# Altium PCB pcb_mcp2200.PcbDoc
Units mm, origin at the board's own origin, x right, y up, seen from the top; angles counter-clockwise.
Board outline 52.5 x 25 mm, 2 copper layers (Top Layer, Bottom Layer); 18 components, 24 nets, 83 pads, 15 vias.
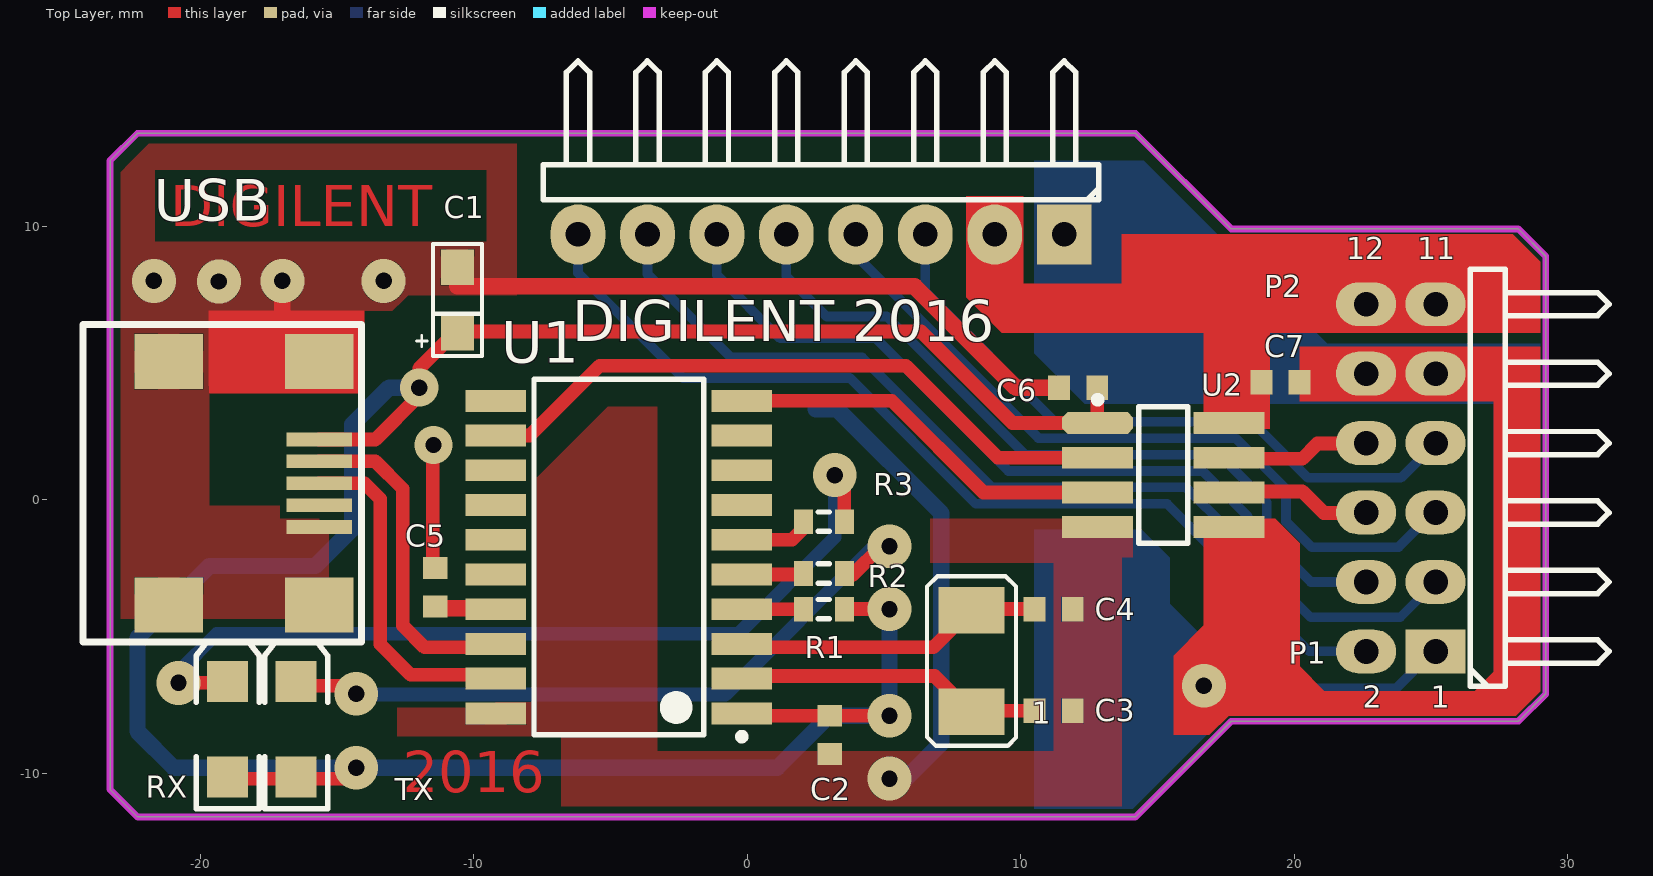
[diagram p0: Top Layer view]
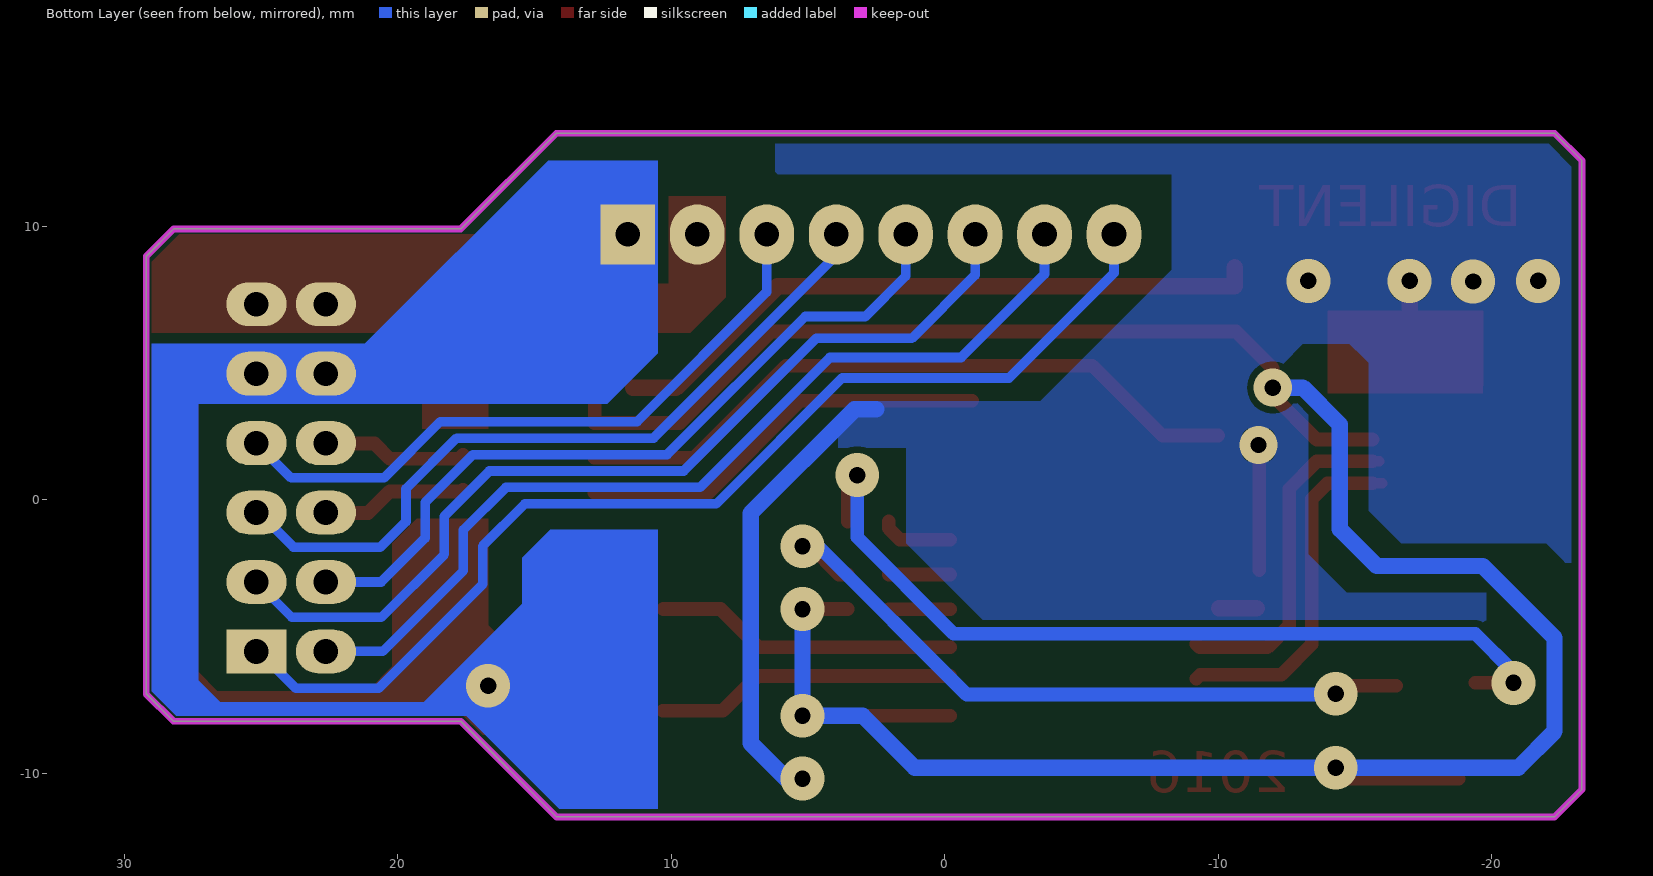
[diagram p1: Bottom Layer view, seen from below]
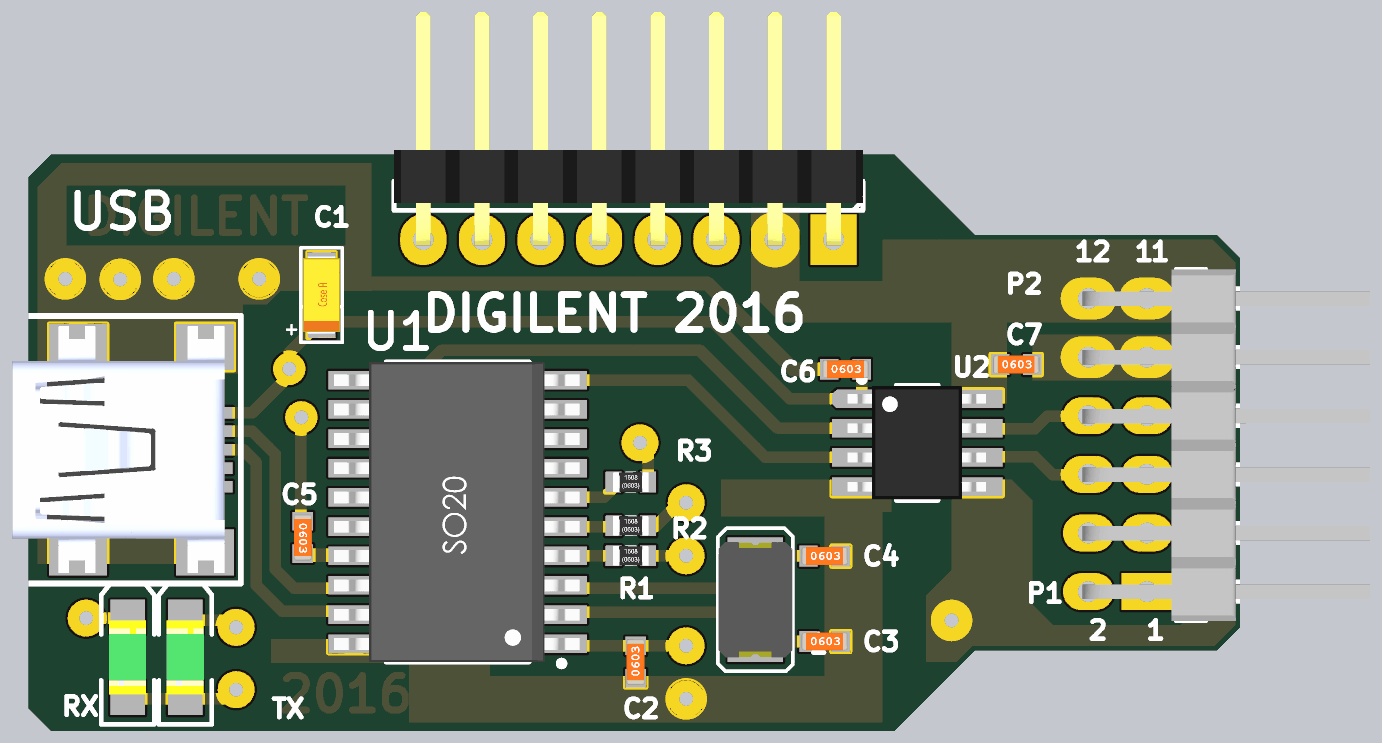
[diagram p2: 3D render of the assembled board from above, using the file's embedded part models]

## Layer stack, top to bottom
Top Solder: solder mask 0.0102, Solder Resist, Dk 3.5
Top Layer: signal copper 0.0356
Dielectric 1: dielectric 0.32, FR-4, Dk 4.8
Bottom Layer: signal copper 0.0356
Bottom Solder: solder mask 0.0102, Solder Resist, Dk 3.5

## Board outline
-23.3,-10.6 -23.3,12.4 -22.3,13.4 14.2,13.4 17.7,9.9 28.2,9.9 29.2,8.9 29.2,-7.1 28.2,-8.1 17.7,-8.1 14.2,-11.6 -22.3,-11.6

## Design rules (kind name [scope] priority, off if disabled: settings)
Clearance [All] p1: gap=0.25
DiffPairsRouting [All] p1: maxlimit=0.254 minlimit=0.25 mostfreqgap=0.25 toplayer_maxgap=0.25 toplayer_minwidth=0.1 toplayer_maxwidth=1 toplayer_prefwidth=0.5 bottomlayer_minwidth=0.1 bottomlayer_maxwidth=1 bottomlayer_prefwidth=0.5 maxuncoupledlength=12.7
PolygonConnect [All] p1: connectstyle=Relief reliefconductorwidth=0.8 reliefentries=4 polygonreliefangle="90 Angle" airgapwidth=0.01
RoutingVias [All] p1: holewidth=0.711 width=1.27 viastyle="Through Hole" minholewidth=0.711 minwidth=1.27 maxholewidth=0.711 maxwidth=1.27
SolderMaskExpansion [All] p1: expansion=0.102
UnpouredPolygon [All] p1: allowunpoured=FALSE
Width [All] p1: maxlimit=1 minlimit=0.1 preferedwidth=0.3
28 further rules are at their usual default settings.

## Classes and differential pairs
differential pair USB: +USB_P -USB_N

## Components (designator, comment, footprint, x,y, rotation, side; value= is the part's Value field where it differs from the comment)
1 "XTAL" Cuart_SMD_5032 8.2,-5.9 r270 top
C1 "Cap Pol1" "case A" -10.6,7.3 r90 top
C2 "Cap" 0603(C) 3,-8.6 r90 top
C3 "Cap" 0603(C) 11.2,-7.7 r0 top
C4 "Cap" 0603(C) 11.2,-4 r0 top
C5 "Cap" 0603(C) -11.4,-3.2 r270 top
C6 "Cap" 0603(C) 12.1,4.1 r0 top
C7 "Cap" 0603(C) 19.5,4.3 r0 top
P1 "Header 6X2H" "Header 2x6_right angle" 23.9,0.8 r0 top
P2 "Header 8H" "Header_1x8_right angle" 2.7,9.7 r0 top
R1 "Res2" "RezistorSMD (1608)" 2.8,-4 r0 top
R2 "Res2" "RezistorSMD (1608)" 2.8,-2.7 r0 top
R3 "Res2" "RezistorSMD (1608)" 2.8,-0.8 r0 top
RX "LED3" "led smd verde" -19,-8.4 r90 top (schematic designator LED2)
TX "LED3" "led smd verde" -16.5,-8.4 r90 top (schematic designator LED1)
U1 "MCP2200" SOIC_20 -4.7,-2.1 r180 top
U2 "ADUM1201CRZ" "SOIC 8 pini" 15.2,0.9 r0 top
USB "USB MINI B" "USB MINI B" -18.4,0.6 r0 top

## Footprints (in the part's own frame and the unit in brackets; to place one, negate y for a bottom-side part, rotate by r counter-clockwise, add the part's x,y. Pads: shape width x height; smd on the part's side, far side on the other; paste and mask are expansions set on the pad)
0603(C) [mm] "Condensator SMD (1,6 X 0,8) mm"
  rect 0.8x0.9 smd: 1(-0.7,-0.013) 2(0.7,-0.013)
  body extent -1,-0.4 1,0.38, height 0.77
"case A" [mm] "condensator smd tantal case A [3216]"
  rect 1.3x1.2 smd: 1(-1.2,0) 2(1.2,0)
  silkscreen extent -2.05,-0.9 2.05,1.5, body extent -1.7,-0.8 1.7,0.8, height 1.65
Cuart_SMD_5032 [mm]
  rect 1.7x2.4 smd: 1(-1.85,0) 2(1.85,0)
  silkscreen extent -3.1,-1.63 3.1,1.63, body extent -2.5,-1.6 2.5,1.6, height 1.35
"Header 2x6_right angle" [mm]
  rect 2.2x1.6 hole 0.9: 1(1.27,-6.35)
  oval 2.2x1.6 hole 0.9: 2(-1.27,-6.35) 3(1.27,-3.81) 4(-1.27,-3.81) 5(1.27,-1.27) 6(-1.27,-1.27) 7(1.27,1.27) 8(-1.27,1.27) 9(1.27,3.81) 10(-1.27,3.81) 11(1.27,6.35) 12(-1.27,6.35)
  silkscreen extent 2.54,-7.62 7.62,7.62, body extent -1.52,-7.63 10.93,7.61, height 5.6
"Header_1x8_right angle" [mm]
  rect 2x2.2 hole 0.9: 1(8.89,0)
  oval 2x2.2 hole 0.9: 2(6.35,0) 3(3.81,0) 4(1.27,0) 5(-1.27,0) 6(-3.81,0) 7(-6.35,0) 8(-8.89,0)
  silkscreen extent -10.16,1.27 10.16,6.35, body extent -10.16,-0.25 10.16,9.88, height 2.51
"led smd verde" [mm]
  rect 1.5x1.5 smd: 1(-1.75,0) 2(1.75,0)
  silkscreen extent -2.9,-1.15 3.2,1.15, body extent -1.6,-0.79 1.6,0.81, height 1.11
"RezistorSMD (1608)" [mm]
  rect 0.7x0.9 smd: 1(0.75,0) 2(-0.75,0)
  silkscreen extent -0.2,-0.35 0.2,0.35, body extent -0.77,-0.43 0.78,0.42, height 0.45
"SOIC 8 pini" [mm]
  oct 2.6x0.8 smd: 1(-2.387,1.905)
  rect 2.6x0.8 smd: 2(-2.387,0.635) 3(-2.387,-0.635) 4(-2.387,-1.905) 5(2.413,-1.905) 6(2.413,-0.635) 7(2.413,0.635) 8(2.413,1.905)
  silkscreen extent -2.51,-2.5 0.91,2.88, body extent -3,-2.45 3,2.45, height 1.75
SOIC_20 [mm]
  rect 2.2x0.8 smd: 1(-4.5,5.715) 2(-4.5,4.445) 3(-4.5,3.175) 4(-4.5,1.905) 5(-4.5,0.635) 6(-4.5,-0.635) 7(-4.5,-1.905) 8(-4.5,-3.175) 9(-4.5,-4.445) 10(-4.5,-5.715) 11(4.5,-5.715) 12(4.5,-4.445) 13(4.5,-3.175) 14(4.5,-1.905) 15(4.5,-0.635) 16(4.5,0.635) 17(4.5,1.905) 18(4.5,3.175) 19(4.5,4.445) 20(4.5,5.715)
  silkscreen extent -4.62,-6.5 3.1,6.69, body extent -5.28,-6.49 5.35,6.51, height 2.66
"USB MINI B" [mm]
  rect 2.4x0.5 smd: 1(2.75,1.6) 2(2.75,0.8) 3(2.75,0) 4(2.75,-0.8) 5(2.75,-1.6)
  rect 2.5x2 smd: PAD(-2.75,-4.45) PAD(-2.75,4.45) PAD(2.75,-4.45) PAD(2.75,4.45)
  silkscreen extent -5.9,-5.8 4.3,5.8, body extent -5.6,-5.35 3.6,5.35, height 3.95

## Part data
1: "Crystal Oscillator"
C1: "Polarized Capacitor (Radial)"
C2 C3 C4 C5 C6 C7: "Capacitor"
P1: "Header, 6-Pin, Dual row, Right Angle"
P2: "Header, 8-Pin, Right Angle"
R1 R2 R3: "Resistor"
RX TX: "Typical BLUE SiC LED"
U1: "USB 2.0 to UART Protocol Converter with GPIO"

## Via types
v1: diameter 1.6, hole 0.6, Top Layer to Bottom Layer, 13 vias
v2: diameter 1.4, hole 0.6, Top Layer to Bottom Layer, 2 vias

## Nets (pads, with @x,y where several pads share a name; then routed paths per layer and width w, separated by ;. In a path a pad name is that pad's centre, name@x,y a point inside that pad or via, vN(x,y) a via of type N, cw(c..) or ccw(c..) an arc to the next point about the centre after c; other vN are vias at no path point)
+5V: C1.1 C2.2 C6.2 R1.1 RX.1 TX.1 U1.1 U2.1 USB.1 | length 97.5
  Top Layer w0.5: RX.1@-18.8,-10.2 -14.7,-10.2 v1(-14.3,-9.8) ; USB.1 -13.6,2.2 -12,3.8 v2(-12,4.1) -12,4.8 -10.65,6.15 6.35,6.15 9.695,2.805 U2.1 ; U1.1@-0.2,-7.9 v1(5.2,-7.9) ; R1.1 v1(5.2,-4) ; U2.1@12.8,2.818 C6.2
  Bottom Layer w0.6: v2(-12,4.1) -13.1,4.1 -14.45,2.75 -14.45,-1.075 -15.8,-2.425 -19.675,-2.425 -22.3,-5.05 -22.3,-8.475 -20.975,-9.8 v1(-14.3,-9.8) 1.1,-9.8 3,-7.9 v1(5.2,-7.9) v1(5.2,-4)
GND: C1.2 C2.1 C3.2 C4.2 C5.1 C6.1 U1.20 U2.4 USB.5 USB.PAD | length 49.3
  Top Layer w0.5: C5.1@-11.5,-2.575 v2@-11.5,2
  Top Layer w0.6: v1(-17,8) -17,6.4 USB.PAD@-15.65,5.05 ; C1.2 -10.6,7.8 6.118,7.8 9.831,4.087 C6.1
  Bottom Layer w0.6: 2.5,3.3 3.3,3.3 7.1,-0.5 7.1,-8.9 5.8,-10.2 v1(5.2,-10.2)
  other v1: -19.322,7.978 -21.7,8 -13.3,8
  other v2: -11.475,2
GND_TARGET: C7.2 P1.9 P1.10 P2.1 U2.5
  other v1: 16.7,-6.8
I/O_1: P1.1 P2.8 | length 40.4
  Bottom Layer w0.35: P2.8 -6.19,8.29 -2.35,4.45 3.75,4.45 8.35,-0.15 15.35,-0.15 16.9,-1.7 16.9,-3.1 20.7,-6.9 23.73,-6.9 25.08,-5.55 P1.1
I/O_2: P1.2 P2.7 | length 34.3
  Bottom Layer w0.35: P2.7 -3.65,8.25 -0.6,5.2 4.2,5.2 8.95,0.45 16.05,0.45 17.6,-1.1 17.6,-2.6 20.55,-5.55 P1.2
I/O_3: P1.3 P2.6 | length 34.3
  Bottom Layer w0.35: P2.6 -1.11,8.21 1.2,5.9 4.7,5.9 9.55,1.05 16.65,1.05 18.3,-0.6 18.3,-2 20.6,-4.3 23.88,-4.3 P1.3
I/O_4: P1.4 P2.5 | length 28.1
  Bottom Layer w0.35: P2.5 1.43,8.17 2.9,6.7 5.1,6.7 10.15,1.65 17.25,1.65 19,-0.1 19,-1.4 20.61,-3.01 P1.4
I/O_5: P1.5 P2.4 | length 27.6
  Bottom Layer w0.35: P2.4 3.97,8.93 10.65,2.25 17.85,2.25 19.7,0.4 19.7,-0.8 20.635,-1.735 23.815,-1.735 25.08,-0.47 P1.5
I/O_6: P1.7 P2.3 | length 24.1
  Bottom Layer w0.35: P2.3 6.51,7.59 11.25,2.85 18.45,2.85 20.5,0.8 23.9,0.8 P1.7
Net1_1: 1.1 C4.1 U1.3 | length 11.1
  Top Layer w0.5: U1.3@-0.2,-5.4 6.8,-5.4 8.2,-4 C4.1@10.287,-4
Net1_2: 1.2 C3.1 U1.2 | length 11
  Top Layer w0.5: U1.2@-0.2,-6.45 6.85,-6.45 8.113,-7.713 C3.1@10.3,-7.713
NetC5_2: C5.2 U1.17 | length 1.4
  Top Layer w0.6: C5.2@-11.413,-3.975 U1.17@-10.03,-3.975
NetR1_2: R1.2 U1.4 | length 2.3
  Top Layer w0.5: U1.4 R1.2@2.05,-4.005
NetR2_1: R2.1 TX.2 | length 26.2
  Top Layer w0.5: TX.2@-16.5,-6.8 -14.6,-6.8 v1(-14.3,-7.1) ; R2.1@3.55,-2.735 3.865,-2.735 4.9,-1.7 v1(5.2,-1.7)
  Bottom Layer w0.5: v1(-14.3,-7.1) -14.275,-7.125 -0.8,-7.125 4.625,-1.7 v1(5.2,-1.7)
NetR2_2: R2.2 U1.5 | length 2.3
  Top Layer w0.5: U1.5 R2.2@2.05,-2.735
NetR3_1: R3.1 RX.2 | length 32
  Top Layer w0.5: v1(-20.8,-6.7) RX.2@-19.4,-6.7 ; v1(3.2,0.9) 3.55,0.55 R3.1
  Bottom Layer w0.5: v1(-20.8,-6.7) -20.8,-6.3 -19.4,-4.9 -0.325,-4.9 3.2,-1.375 v1(3.2,0.9)
NetR3_2: R3.2 U1.6 | length 2.7
  Top Layer w0.5: U1.6 1.635,-1.465 2.05,-1.05 R3.2
RX: U1.12 U2.2 | length 25.3
  Top Layer w0.5: U1.12@-10,2.345 -7.955,2.345 -5.4,4.9 5.8,4.9 9.165,1.535 U2.2
RX_TARGET: P1.6 U2.6 | length 5.3
  Top Layer w0.5: U2.6@17.613,0.365 17.678,0.3 20.3,0.3 21.085,-0.485 P1.6@22.525,-0.485
TX: U1.10 U2.3 | length 15.2
  Top Layer w0.5: U1.10@-1,3.615 5.285,3.615 8.635,0.265 U2.3
TX_TARGET: P1.8 U2.7 | length 5.2
  Top Layer w0.5: U2.7@17.613,1.635 17.748,1.5 20.3,1.5 20.855,2.055 P1.8@22.525,2.055
USB_N: U1.18 USB.2 | length 12.5
  Top Layer w0.381: USB.2@-15.9,1.4 USB.2
  Top Layer w0.5: USB.2 -13.6,1.4 -12.6,0.4 -12.6,-4.6 -11.8,-5.4 -9.325,-5.4 U1.18
USB_P: U1.19 USB.3 | length 12.9
  Top Layer w0.381: USB.3@-16,0.6 USB.3
  Top Layer w0.5: USB.3 -14,0.6 -13.425,0.025 -13.425,-5.286 -12.311,-6.4 -9.345,-6.4 U1.19
VDD_TARGET: C7.1 P1.11 P1.12 P2.2 U2.8
pads on no net: U1.7 U1.8 U1.9 U1.11 U1.13 U1.14 U1.15 U1.16 USB.4

## Polygon pours and split planes (outlines as drawn)
GND on Top Layer "GND" (solid, pour order 4): -23.05,-4.35 -15.3,-4.35 -15.3,-3.35 -15.3,-0.85 -15.8,-0.35 -15.925,-0.225 -16.975,-0.225 -19.675,-0.225 -19.675,0.95 -19.675,3.9 -16.675,6.9 -15.575,6.9 -12.975,6.9 -12.6,7.275 -12.4,7.475 -10.675,7.475 -8.425,7.475 -8.425,10.275 -8.425,13.4 -21.5,13.4 -22.6,12.3 -23.1,11.8 -23.1,10.65 -23.1,-4.35
GND on Top Layer "GND" (solid, pour order 2): 12.813,-1.005 12.813,-0.7 10.2,-0.7 6.7,-0.7 6.7,-1.6 6.7,-2.3 9.9,-2.3 11.2,-2.3 11.2,-3.4 11.2,-9.2 1.213,-9.2 -3.3,-9.2 -3.3,3.4 -4.8,3.4 -5.1,3.4 -6.4,2.1 -7.7,0.8 -7.7,-0.3 -7.7,-7.6 -9,-7.6 -12.8,-7.6 -12.8,-8.6 -12.8,-9.1 -14.3,-9.1 -12.8,-9.1 -12.8,-11.6 13.7,-11.6 13.7,-2.1 14,-2.1 14.1,-2.1 14.1,-1
GND on Bottom Layer "GND" (solid, pour order 10): -23.3,-1.7 -23.3,11.8 -21.7,13.4 6.2,13.4 6.2,11.9 -7.3,11.9 -8.3,11.9 -8.3,10.4 -8.3,8.4 -6.3,6.4 -3.5,3.6 -1.2,3.6 3.1,3.6 3.9,2.8 3.9,2.2 3.9,1.9 2.7,1.9 1.4,1.9 1.4,0.6 1.4,-1.6 0.3,-2.7 -2.1,-5.1 -4.5,-5.1 -19.8,-5.1 -19.8,-3.7 -19.8,-3.4 -15.6,-3.4 -14.7,-3.4 -13.3,-2 -13.3,0.1 -13.3,3.2 -12.7,3.8 -12.3,4.2 -12.3,4.9 -13.1,5.7 -14.7,5.7 -14.8,5.7 -15.3,5.2 -15.5,5 -15.5,3.8 -15.5,-0.4 -16.5,-1.4 -16.7,-1.6 -18.9,-1.6 -22,-1.6 -22.6,-2.2 -22.7,-2.3 -23.3,-2.3

## Keep-outs
Keep-Out Layer:
  lines w0.25: -23.3,-10.6 -23.3,12.4 -22.3,13.4 3.2,13.4 14.2,13.4 17.7,9.9 28.2,9.9 29.2,8.9 29.2,-7.1 28.2,-8.1 17.7,-8.1 14.2,-11.6 -22.3,-11.6 -23.3,-10.6

## Other copper
Top Layer:
  region net GND: -19.675,3.9 -14,3.9 -14,6.9 -19.7,6.9 -19.7,4.4
  region net GND_TARGET: 27.3,3.6 27.3,-6.3 26.6,-7 21.1,-7 20.2,-6.1 20.2,-7.9 28.1,-7.9 29,-7 29,5.6 27.6,5.6 27.6,3.6
  region net GND_TARGET: 16.7,-0.7 19.3,-0.7 20.2,-1.6 20.2,-7.9 17.6,-7.9 16.9,-8.6 15.6,-8.6 15.6,-5.7 16.7,-4.6
  region net GND_TARGET: 20.2,4.287 20.2,5.6 27.6,5.6 27.6,3.6 20.2,3.6
  region net VDD_TARGET: 16.7,6.1 16.7,2.6 19.1,2.6 19.1,6.1
  region net VDD_TARGET: 8,11.1 8,7.4 9.3,6.1 29,6.1 29,8.7 28,9.7 13.7,9.7 13.7,7.9 10.1,7.9 10.1,11.1
  text "DIGILENT" at -21.1,10 h1.5
  text "2016" at -12.6,-10.7 h1.5
Bottom Layer:
  region net GND_TARGET: 27.7,5.7 29,5.7 29,-7 28.1,-7.9 17.5,-7.9 14.1,-11.3 10.5,-11.3 10.5,-1.1 14.425,-1.1 15.45,-2.125 15.45,-3.8 19.05,-7.4 26.5,-7.4 27.3,-6.6 27.3,3.5 27.7,3.5
  region net GND_TARGET: 10.5,12.4 10.5,5.35 12.35,3.5 27.7,3.5 27.7,5.7 21.2,5.7 14.5,12.4

## Silkscreen, mask and mechanical layers (free items; w line width, h text height)
Top Overlay:
  text "DIGILENT 2016" at -6.4,5.8 h1.5

## Text inside footprints (layer, text, board x,y; h text height)
P1: Top Overlay "12" at 21.9,8.8 h0.8; Top Overlay "1" at 24.5,8.8 h0.8; Top Overlay "1" at 25.2,8.8 h0.8; Top Overlay "1" at 25,-7.6 h0.8; Top Overlay "2" at 22.5,-7.6 h0.8